# Altium PCB PCB1.PcbDoc
Units mm, origin at the board's own origin, x right, y up, seen from the top; angles counter-clockwise.
Board outline 12 x 32 mm, 2 copper layers (Top Layer, Bottom Layer), stack 1.569 mm thick; 26 components, 17 nets, 79 pads, 10 vias.
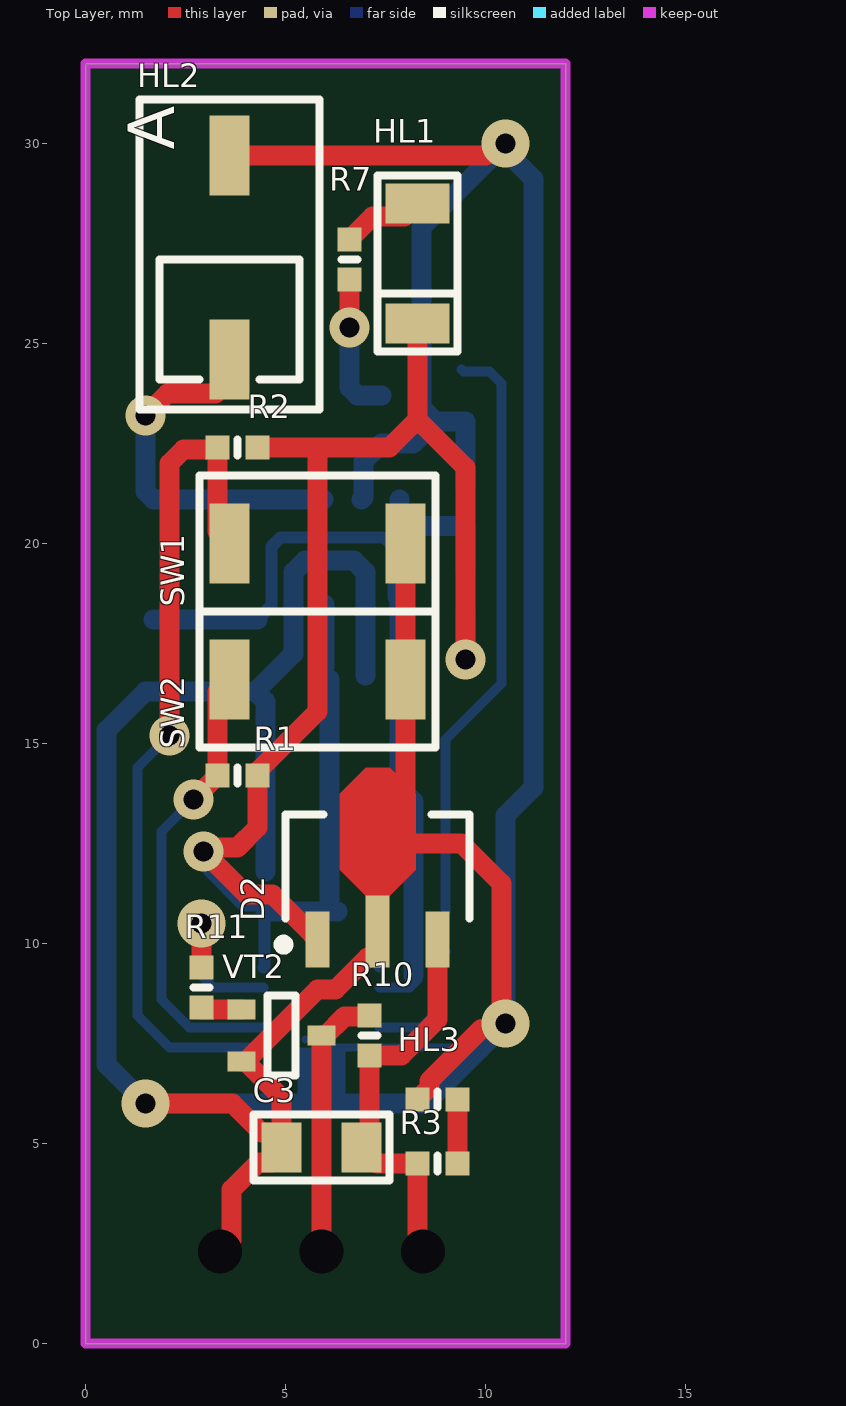
[diagram p0: Top Layer view]
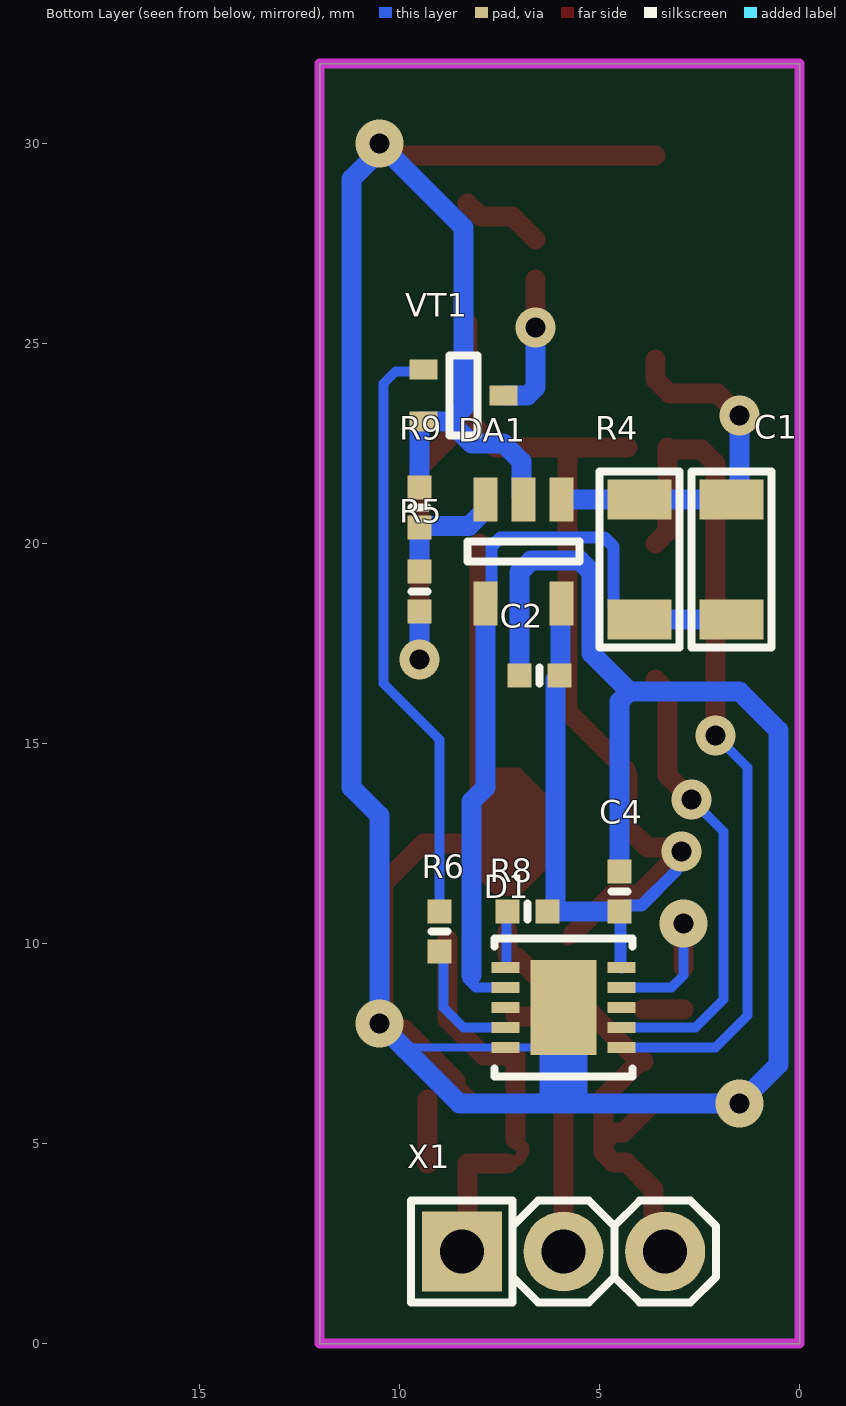
[diagram p1: Bottom Layer view, seen from below]
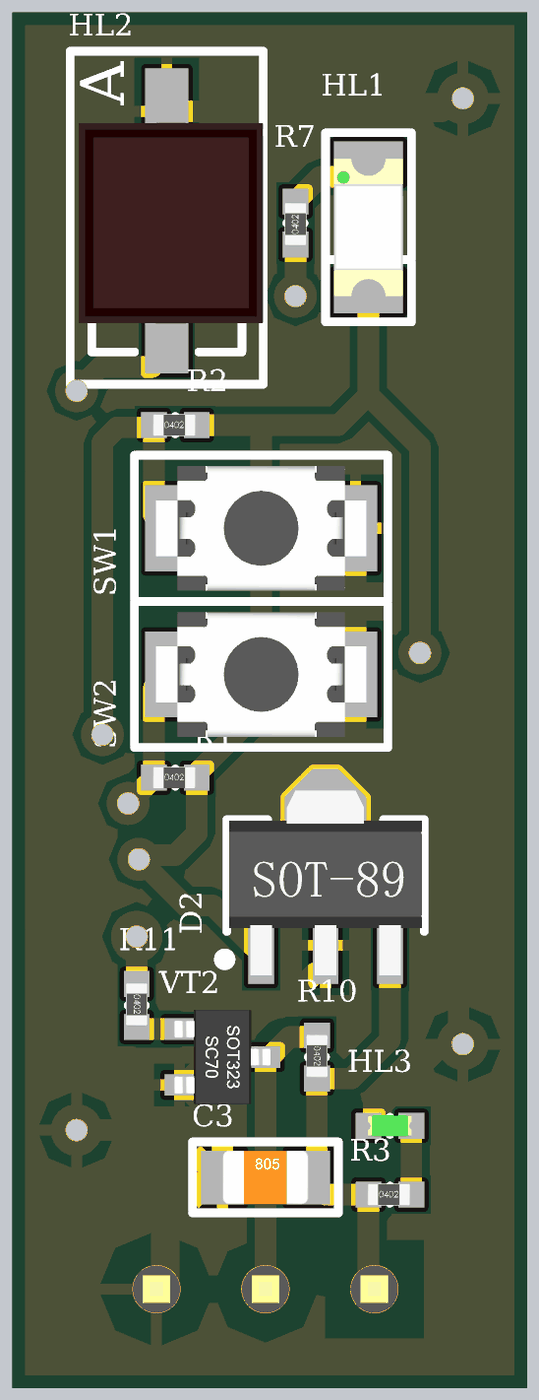
[diagram p2: 3D render of the assembled board from above, using the file's embedded part models]
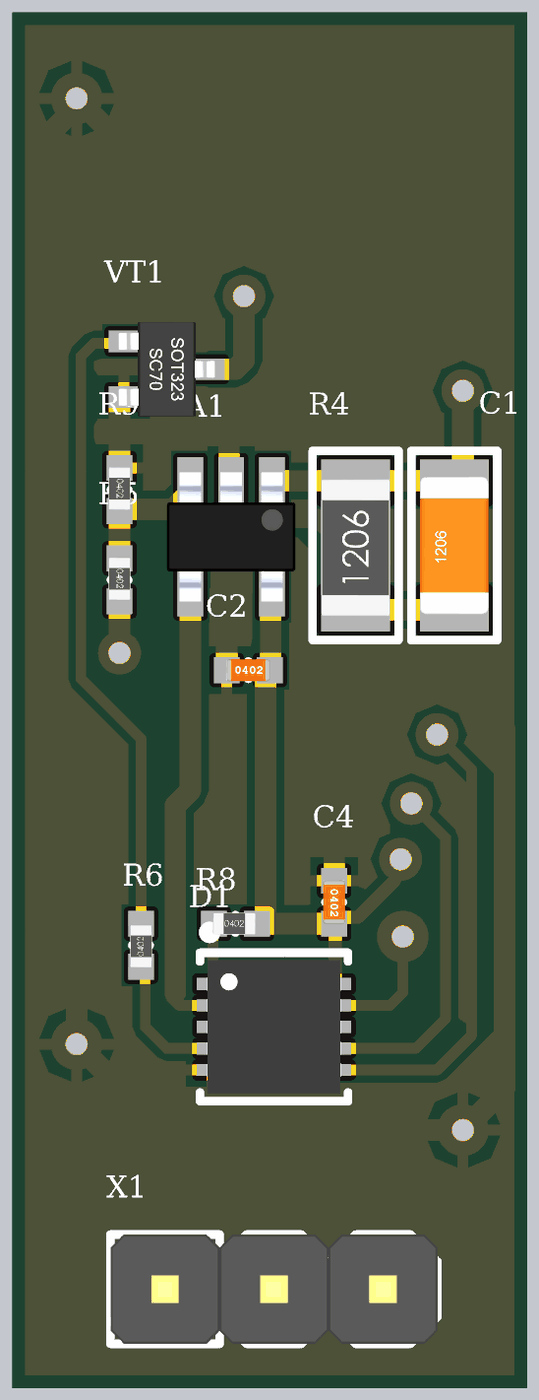
[diagram p3: 3D render of the assembled board from below, using the file's embedded part models]

## Layer stack, top to bottom
Top Solder: solder mask 0.0254, SM-001, Dk 4
Top Layer: signal copper 0.035
Dielectric 1: core 1.4986, Core-043, Dk 4.3
Bottom Layer: signal copper 0.035
Bottom Solder: solder mask 0.0254, SM-001, Dk 4

## Board outline
0,0 12,0 12,32 0,32

## Design rules (kind name [scope] priority, off if disabled: settings)
Clearance [All] p1: gap=0.15 ignorepadtopadclearanceinfootprint=FALSE
PolygonConnect [All] p1: connectstyle=Relief reliefconductorwidth=0.254 reliefentries=4 polygonreliefangle="90 Angle" airgapwidth=0.254
RoutingVias [All] p1: holewidth=0.711 width=1.27 viastyle="Through Hole" minholewidth=0.711 minwidth=1.27 maxholewidth=0.711 maxwidth=1.27
SolderMaskExpansion [All] p1: expansion=0.102 istentingtop=FALSE
UnpouredPolygon [InNet('No Net')] p1:
Width [All] p1: maxlimit=1 minlimit=0.1 preferedwidth=0.254
29 further rules are at their usual default settings.

## Components (designator, comment, footprint, x,y, rotation, side; value= is the part's Value field where it differs from the comment)
C1 "Ceramic capacitor, 18pF, X7R, ±10%, 16V, 0402, -55...+125°C" "CAP: 1206" 1.7,19.6 r90 bottom value=18pF
C2 "Ceramic capacitor, 1μF, X7R, ±10%, 6.3V, 0402, -55...+125°C" "CAP: 0402" 6.5,16.7 r180 bottom value=1μF
C3 "Ceramic capacitor, 1μF, X7R, ±10%, 6.3V, 0402, -55...+125°C" "CAP: 0805" 5.9,4.9 r0 top value=1μF
C4 "Ceramic capacitor, 1μF, X7R, ±10%, 6.3V, 0402, -55...+125°C" "CAP: 0402" 4.5,11.3 r270 bottom value=1μF
D1 "Attiny13" 10-DFN 5.9,8.4 r270 bottom
D2 "Linear voltage regulator, max input 18V, 0.6V, output 3.3V, 300mA, -40...+125°C, SOT-89" SOT89 7.3,11.9 r90 top
DA1 "IC op amplifier, Rail-to-Rail, 20 MHz, 2.7...5.5V, -40...+125°C, SOT23-5" SOT23-5 6.9,19.8 r270 bottom
HL1 "KP-3216F3C" "LED: 1206W" 8.3,27 r270 top
HL2 "BP104" BP104 3.6,24.6 r90 top
HL3 "" "LED: 0402G" 8.8,6.1 r0 top
R1 "1.2k" "RES: 0402" 3.8,14.2 r0 top
R2 "1.2k" "RES: 0402" 3.8,22.4 r0 top
R3 "1.2k" "RES: 0402" 8.8,4.5 r0 top
R4 "" "RES: 1206" 4,19.6 r90 bottom
R5 "" "RES: 0402" 9.5,18.8 r270 bottom
R6 "1.2k" "RES: 0402" 9,10.3 r90 bottom
R7 "100" "RES: 0402" 6.6,27.1 r90 top
R8 "1.2k" "RES: 0402" 6.8,10.8 r180 bottom
R9 "" "RES: 0402" 9.5,20.9 r270 bottom
R10 "1.2k" "RES: 0402" 7.1,7.7 r270 top
R11 "1.2k" "RES: 0402" 2.9,8.9 r270 top
SW1 ", 3*4*2mm" "BUT: 3x4x2 SMT" 5.8,20 r0 top
SW2 ", 3*4*2mm" "BUT: 3x4x2 SMT" 5.8,16.6 r0 top
VT1 "NPN transistor, 45V, 100mA, 100MHz, 300mW, 0.6V, 420, SOT-23, -55...+125°C" SC-70 8.4,23.7 r180 bottom
VT2 "NPN transistor, 45V, 100mA, 100MHz, 300mW, 0.6V, 420, SOT-23, -55...+125°C" SC-70 4.9,7.7 r0 top
X1 "Connector, 3pin, 2.54mm, 500VAC, 3A" "CON: PLS-3" 5.9,2.3 r180 bottom

## Footprints (in the part's own frame and the unit in brackets; to place one, negate y for a bottom-side part, rotate by r counter-clockwise, add the part's x,y. Pads: shape width x height; smd on the part's side, far side on the other; paste and mask are expansions set on the pad)
10-DFN [mm] "3x3 mm, pitch 0.5 mm, power pad"
  round 0.7 smd: 0(-0.8,-0.4) 0(-0.8,0.4) 0(0,0) 0(0.8,-0.4) 0(0.8,0.4)
  rect 2.38x1.64 smd mask+0.11: 0(0,0)
  rect 0.28x0.7 smd mask+0.11: 1(-1,-1.45) 2(-0.5,-1.45) 3(0,-1.45) 4(0.5,-1.45) 5(1,-1.45) 6(1,1.45) 7(0.5,1.45) 8(0,1.45) 9(-0.5,1.45) 10(-1,1.45)
  round 0.5 on Bottom Overlay: ""(-2.2,-1.5)
  round 0.5 on Mech1: ""(-1.1,-1.1)
  silkscreen extent -1.73,-1.73 1.73,1.73, body extent -1.55,-1.56 1.55,1.56, height 0.8
BP104 [mm] "Photodiode"
  rect 2x1 smd: 1(0,0) 2(5.1,0)
  silkscreen extent -1.25,-2.25 6.5,2.25, body extent 0.16,-2.25 4.84,2.05, height 2.1
"BUT: 3x4x2 SMT" [mm]
  rect 1x2 smd: 1(-2.2,0) 2(2.2,0)
  silkscreen extent -2.95,-1.7 2.95,1.7, body extent -2.45,-1.45 2.45,1.45, height 2
"CAP: 0402" [mm]
  rect 0.6x0.6 smd: 1(-0.5,0) 2(0.5,0)
  silkscreen extent 0,-0.2 0,0.2, body extent -0.52,-0.25 0.51,0.25, height 0.51
"CAP: 0805" [mm]
  rect 1x1.25 smd: 1(-1,0) 2(1,0)
  silkscreen extent -1.7,-0.82 1.7,0.82, body extent -1,-0.62 1,0.63, height 0.78
"CAP: 1206" [mm]
  rect 1x1.6 smd: 1(-1.5,0) 2(1.5,0)
  silkscreen extent -2.2,-1 2.2,1, body extent -1.6,-0.8 1.6,0.8, height 1
"CON: PLS-3" [mm]
  rect 2x2 / inner rect 2x2 / far side rect 0x0 hole 1.1: 1(-2.54,0)
  round 2 / inner round 2 / far side round 0 hole 1.1: 2(0,0) 3(2.54,0)
  silkscreen extent -3.81,-1.27 3.81,1.27, body extent -3.81,-1.27 3.81,1.27, height 8.54
"LED: 0402G" [mm]
  rect 0.6x0.6 smd: 1(-0.5,0) 2(0.5,0)
  silkscreen extent 0,-0.2 0,0.2, body extent -0.5,-0.25 0.51,0.25, height 0.45
"LED: 1206W" [mm]
  rect 1x1.6 smd: 1(-1.5,0) 2(1.5,0)
  silkscreen extent -2.2,-1 2.2,1, body extent -1.6,-0.8 1.6,0.8, height 1.1
"RES: 0402" [mm]
  rect 0.6x0.6 smd: 1(-0.5,0) 2(0.5,0)
  silkscreen extent 0,-0.2 0,0.2, body extent -0.52,-0.25 0.47,0.25, height 0.34
"RES: 1206" [mm]
  rect 1x1.6 smd: 1(-1.5,0) 2(1.5,0)
  silkscreen extent -2.2,-1 2.2,1, body extent -1.65,-0.8 1.55,0.8, height 0.47
SC-70 [mm]
  rect 0.7x0.5 smd: 1(-1,0.65) 2(-1,-0.65) 3(1,0)
  round 0.5 on Mech1: ""(-0.7,0.7)
  silkscreen extent -0.35,-1 0.35,1, body extent -1.12,-1.1 1.12,1.1, height 1.1
SOT23-5 [mm] "pitch 0.95 mm"
  rect 1.1x0.6 smd: 1(-1.3,0.95) 2(-1.3,0) 3(-1.3,-0.95) 4(1.3,-0.95) 5(1.3,0.95)
  round 0.5 on Mech1: ""(-1.1,1.1)
  silkscreen extent -0.25,-1.4 0.25,1.4, body extent -1.5,-1.5 1.5,1.5, height 1.3
SOT89 [mm]
  rect 1.4x0.6 smd: 1(-1.8,1.5) 3(-1.8,-1.5)
  rect 1.8x0.6 smd: 2(-1.6,0)
  round 0.5 on Mech1: ""(-1.8,1.8)
  Top Layer region: -0.7,0.3 -0.05,0.95 1.85,0.95 2.5,0.3 2.5,-0.3 1.85,-0.95 -0.05,-0.95 -0.7,-0.3
  silkscreen extent -2.05,-2.3 1.32,2.47, body extent -2.3,-2.25 2,2.25, height 1.51

## Part data
C1: library part Capacitor_ceramic, Manufacturer=Yageo, Package=0402, PartNumber=CC0201KRX7R7BB103, Temperature=-55...+125°C, Tolerance=±10%, TypeCapacitor="Ceramic capacitor", TypeDielectric=X7R, Voltage=16V, HelpURL=https://belchip.by/product/?selected_product=39381, ValueManufacturerPartNumber="Ceramic capacitor, 18pF, X7R, ±10%, 16V, 0402, -55...+125°C"
C2 C3 C4: library part Capacitor_ceramic, Manufacturer=Yageo, Package=0402, PartNumber=CC0201KRX7R7BB103, Temperature=-55...+125°C, Tolerance=±10%, TypeCapacitor="Ceramic capacitor", TypeDielectric=X7R, Voltage=6.3V, HelpURL=https://belchip.by/product/?selected_product=18895, ValueManufacturerPartNumber="Ceramic capacitor, 1μF, X7R, ±10%, 6.3V, 0402, -55...+125°C"
D1: library part ATtiny13
D2: library part L78L33ACUTR, "Linear voltage regulator", CurrentOutput=300mA, Manufacturer=Diodes, Package=SOT-89, Temperature=-40...+125°C, VoltageInput="max input 18V", VoltageOutput="output 3.3V", ComponentType="Linear voltage regulator", HelpURL=https://belchip.by/product/?selected_product=31095, MaxDropout=0.6V, PartNumber=L78L33ACUTR, ValueManufacturerPartNumber="Linear voltage regulator, max input 18V, 0.6V, output 3.3V, 300mA, -40...+125°C, SOT-89"
DA1: library part TL331IDBVR, "OP amplifier", Manufacturer=STMicroelectronics, Package=SOT23-5, Temperature=-40...+125°C, ComponentType="IC op amplifier", GainBandwidth="20 MHz", HelpURL=https://belchip.by/product/?selected_product=29505, OutputType=Rail-to-Rail, PartNumber=TL331IDBVR, Supply=2.7...5.5V, ValueManufacturerPartNumber="IC op amplifier, Rail-to-Rail, 20 MHz, 2.7...5.5V, -40...+125°C, SOT23-5"
HL1 HL3: library part Led
  HL1: Calor=940нм, HelpURL=https://belchip.by/product/?selected_product=17450
  HL3: Calor=Green, HelpURL=https://belchip.by/product/?selected_product=38579
HL2: library part Photodiode, HelpURL=https://belchip.by/sitedocs/00012933.pdf
R1 R2 R3 R4 R5 R6 R7 R8 R9 R10 R11: library part Resistor
  R1 R2 R3 R6 R8 R10 R11: HelpURL=https://belchip.by/product/?selected_product=32518
  R7: HelpURL=https://belchip.by/product/?selected_product=40023
SW1 SW2: library part Button_3x4x2_SMT, "SMT 3*4*2 2PIN", Manufacturer="xin cheng electronic", Package=3*4*2mm, PartNumber="3*4*2 2PIN", CommentText="\"Кнопка\"", HelpURL=https://belchip.by/product/?selected_product=32927, ValueManufacturerPartNumber=", 3*4*2mm"
VT1 VT2: library part Bipolar_NPN, CurrentCE=100mA, CurrentGain=420, Frequency=100MHz, Manufacturer="ON Semiconductor", MaxPower=300mW, Package=SOT-23, PartNumber=BC817CLT1G, Temperature=-55...+125°C, VoltageCE=45V, VoltageSaturation=0.6V, HelpURL=https://www.digikey.com/product-detail/en/on-semiconductor/BC847CLT1G/BC847CLT1GOSCT-ND/917836, TypeTransistor="NPN transistor", ValueManufacturerPartNumber="NPN transistor, 45V, 100mA, 100MHz, 300mW, 0.6V, 420, SOT-23, -55...+125°C"
X1: library part PLS-3, CurrentMax=3A, Manufacturer=Connfly, VoltageMax=500VAC, CommentText="\"Разъем\"", HelpURL=https://www.chipdip.ru/product/pls-3, Multichannel=3pin, PartNumber=PLS-3, Pitch=2.54mm, TypeConnector=Connector, ValueManufacturerPartNumber="Connector, 3pin, 2.54mm, 500VAC, 3A"

## Via types
v1: diameter 1, hole 0.5, Top Layer to Bottom Layer, tented both sides, 6 vias
v2: diameter 1.2, hole 0.5, Top Layer to Bottom Layer, tented both sides, 4 vias

## Nets (pads, with @x,y where several pads share a name; then routed paths per layer and width w, separated by ;. In a path a pad name is that pad's centre, name@x,y a point inside that pad or via, vN(x,y) a via of type N, cw(c..) or ccw(c..) an arc to the next point about the centre after c; other vN are vias at no path point)
+3.3: C2.2 C4.2 D1.10 D2.1 DA1.5 HL1.2 R1.2 R2.2 R5.2 R8.2 | length 43.1
  Top Layer w0.3: D2.1@5.65,10.25 D2.1
  Top Layer w0.5: R2.2 5.8,22.4 ; D2.1@5.65,10.25 4.673,11.227 4.023,11.227 v1(2.95,12.3) 3.046,12.396 3.796,12.396 4.3,12.9 R1.2 4.35,14.25 4.35,14.35 5.8,15.8 5.8,22.4 ; HL1.2 8.3,23.1 ; v1(9.5,17.1) 9.5,21.9 8.3,23.1 ; 5.8,22.4 7.6,22.4 8.3,23.1
  Bottom Layer w0.3: v1(2.95,12.3) 3.084,12.166 3.084,11.816 3.95,10.95 4.35,10.95 C4.2 4.475,10.775 4.475,9.415 4.46,9.4 D1.10 ; DA1.5 DA1.5@5.975,18.475 ; C2.2@5.975,16.925 C2.2@6,16.9 ; C2.2 C2.2@6.1,16.6 ; R8.2@6.1,11 R8.2
  Bottom Layer w0.5: C4.2 R8.2 ; C2.2@5.975,16.925 DA1.5@5.975,18.475 ; R8.2@6.1,11 C2.2@6.1,16.6 ; v1(9.5,17.1) R5.2
DATA: R10.1 VT2.3 X1.2 | length 6.8
  Top Layer w0.5: X1.2 VT2.3 6,7.7 6.47,8.17 7.07,8.17 R10.1
GND: C2.1 C3.1 C4.1 D1.0 D1.5 D2.2 DA1.2 HL2.2 HL3.1 R9.1 SW1.2 SW2.2 VT1.2 VT2.2 X1.3 | length 114.9
  Top Layer w0.5: v2(1.5,6) 3.675,6 4.4,5.275 4.65,5.275 C3.1@4.9,5.025 ; X1.3 3.647,2.587 3.647,3.847 4.325,4.525 4.65,4.525 4.9,4.775 C3.1 C3.1@4.9,5.025 ; HL2.2 v2@10.011,29.7 ; VT2.2 VT2.2@4,7.05 ; D2.2 7.3,9.7 7.25,9.65 7.05,9.65 6.25,8.85 5.8,8.85 VT2.2@4,7.05 ; SW2.2 8,13.2 7.5,12.7 7.7,12.5 9.4,12.5 10.4,11.5 10.4,8.1 v2(10.5,8) ; SW2.2@8,16.665 SW1.2 ; HL3.1 8.6,6.4 8.6,6.566 9.9,7.866 ; VT2.2@4,7.05 4.9,6.15 C3.1@4.9,5.025
  Bottom Layer w0.2: D1.0@5.5,7.6 5.635,7.6 5.835,7.4 6.3,7.4 D1.5 9.827,7.4
  Bottom Layer w0.5: C4.1 4.5,16.05 4.25,16.3 ; DA1.2 6.95,21.15 6.95,22.05 7.4,22.5 8.193,22.5 8.743,23.05 ; C2.1 7,19.282 6.707,19.575 5.493,19.575 5.2,19.282 5.2,17.25 4.25,16.3 ; R9.1 9.5,23.05 VT1.2 8.743,23.05 ; 4.25,16.3 1.5,16.3 0.527,15.327 0.527,6.973 v2(1.5,6) 8.5,6 9.864,7.364 v2(10.5,8) 10.5,13.2 11.2,13.9 11.2,29.111 10.5,29.811 v2(10.5,30) 8.4,27.9 8.4,23.393 8.743,23.05
NetC1_1: C1.1 D1.2 DA1.4 R4.1 | length 19.8
  Bottom Layer w0.25: D1.2 8.1,8.9 8.3,9.1
  Bottom Layer w0.3: R4.1@4.3,18.1 4.65,18.45 4.65,19.924 4.876,20.15 7.474,20.15 7.7,19.924 7.7,18.65 DA1.4
  Bottom Layer w0.5: C1.1 R4.1@4.3,18.1 ; DA1.4 7.85,13.9 8.2,13.55 8.2,9.2
NetC1_2: C1.2 DA1.1 HL2.1 R4.2 | length 9.4
  Top Layer w0.5: v1(1.5,23.2) 2.05,23.75 3.25,23.75 3.6,24.1 HL2.1
  Bottom Layer w0.5: v1(1.5,23.2) 1.5,21.3 C1.2 R4.2 DA1.1
NetD1_1: D1.1 R8.1 | length 1.4
  Bottom Layer w0.25: R8.1 7.325,10.775 7.325,9.415 7.34,9.4 D1.1
NetD1_4: D1.4 R6.1 | length 3.2
  Bottom Layer w0.25: D1.4 8.4,7.9 8.9,8.4 8.9,9.7 R6.1
NetD1_6: D1.6 R2.1 SW1.1 | length 21.5
  Top Layer w0.5: v1(2.1,15.2) 2.1,22 2.45,22.35 3.25,22.35 R2.1 3.3,20.3 SW1.1
  Bottom Layer w0.25: v1(2.1,15.2) 1.3,14.4 1.3,8.2 2.1,7.4 D1.6
NetD1_7: D1.7 R1.1 SW2.1 | length 11.5
  Top Layer w0.5: v1(2.7,13.6) R1.1 3.3,16.3 SW2.1
  Bottom Layer w0.25: v1(2.7,13.6) 1.9,12.8 1.9,8.6 2.6,7.9 D1.7
NetD1_9: D1.9 R11.1 | length 4.1
  Top Layer w0.5: R11.1 v2(2.9,10.5)
  Bottom Layer w0.25: v2(2.9,10.5) 2.9,9.2 3.2,8.9 D1.9
NetDA1_3: DA1.3 R5.1 R9.2 | length 3.2
  Bottom Layer w0.5: DA1.3 7.85,20.85 8.262,20.438 9.462,20.438 R9.2 R5.1
NetHL1_1: HL1.1 R7.2 | length 2.1
  Top Layer w0.5: R7.2 7.174,28.174 7.974,28.174 HL1.1
NetHL3_2: HL3.2 R3.2 | length 1.6
  Top Layer w0.5: R3.2 HL3.2
NetR6_2: R6.2 VT1.1 | length 14.9
  Bottom Layer w0.25: R6.2 9,15.1 10.4,16.5 10.4,24 10.1,24.3 9.45,24.3 VT1.1
NetR7_1: R7.1 VT1.3 | length 3.6
  Top Layer w0.5: v1(6.6,25.4) R7.1
  Bottom Layer w0.5: v1(6.6,25.4) 6.6,23.9 6.8,23.7 VT1.3
NetR11_2: R11.2 VT2.1 | length 1
  Top Layer w0.5: R11.2@2.9,8.35 VT2.1
VCC: C3.2 D2.3 R3.1 R10.2 X1.1 | length 10.4
  Top Layer w0.3: C3.2@7.1,5.1 cw(c6.9,5.1) C3.2 ccw(c7.3,4.9) C3.2@7.3,4.5 ; 8.3,2.44 ccw(c8.44,2.44) X1.1
  Top Layer w0.5: C3.2@7.1,5.1 7.1,6.6 R10.2 7.9,7.2 8.8,8.1 D2.3 ; C3.2@7.3,4.5 R3.1 8.3,2.44
pads on no net: D1. D1.3 D1.8 D2. DA1. VT1. VT2.

## Polygon pours and split planes (outlines as drawn)
GND on Top Layer "GND" (solid, shelved, pour order 0): 0,0 0,32 12,32 12,0
GND on Bottom Layer "GND" (solid, shelved, pour order 2): 11,-5.5
GND on Bottom Layer "GND" (solid, shelved, pour order 1): 0,0 0,32 12,32 12,0

## Keep-outs
Keep-Out Layer:
  the board outline again, w0.254

## Other copper
Top Layer:
  pour cut-out: 2.533,15.724 2.533,21.821 2.662,21.95 4.75,21.95 4.75,21.967 5.367,21.967 5.367,15.976 4.041,14.65 3.85,14.65 3.85,14.684 3.733,14.802 3.733,15.45 2.986,15.45 2.867,15.569 2.827,15.53 2.667,15.53
  region: 7.7,16.4
  region: 17.85,19.6
Bottom Layer:
  rectangle net GND: 5.3,5.9 6.5,7.4

## Text inside footprints (layer, text, board x,y; h text height)
HL2: Top Overlay "A" at 2.6,29.85 h2 r90